# EAGLE board PCB_v8 (EAGLE 9.7.0)
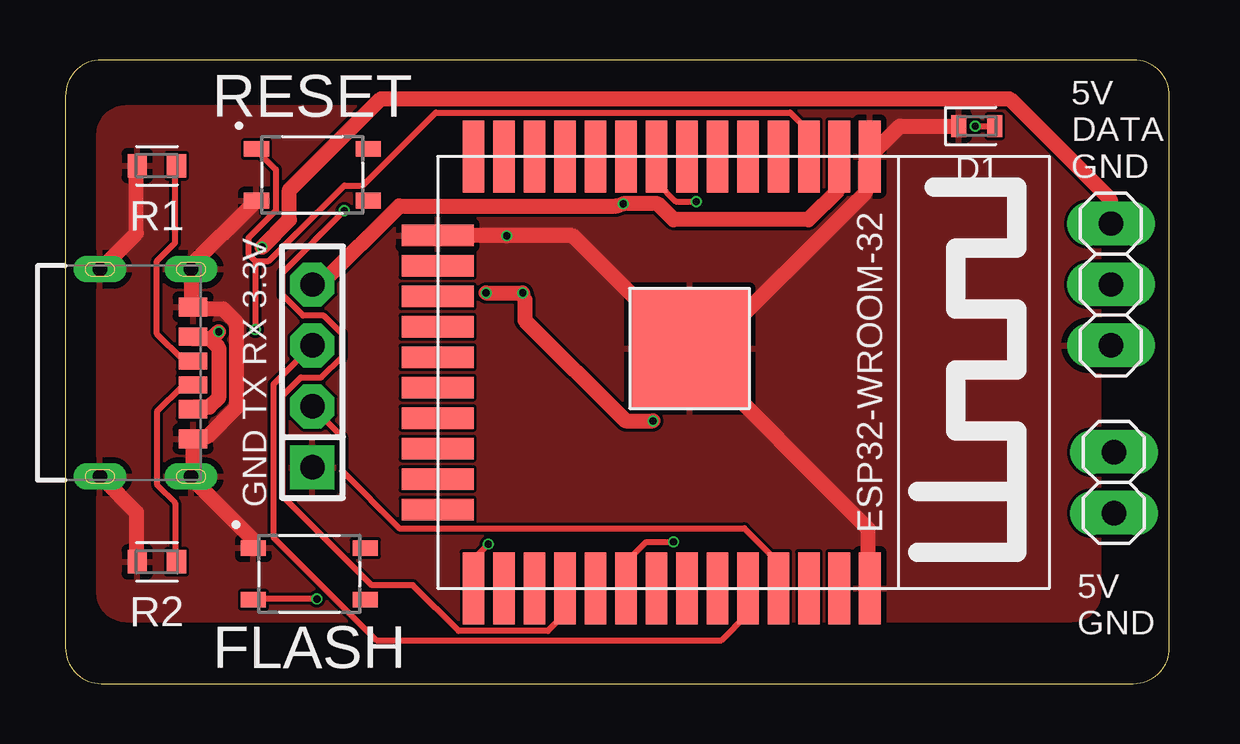
[diagram p0: board, top side]
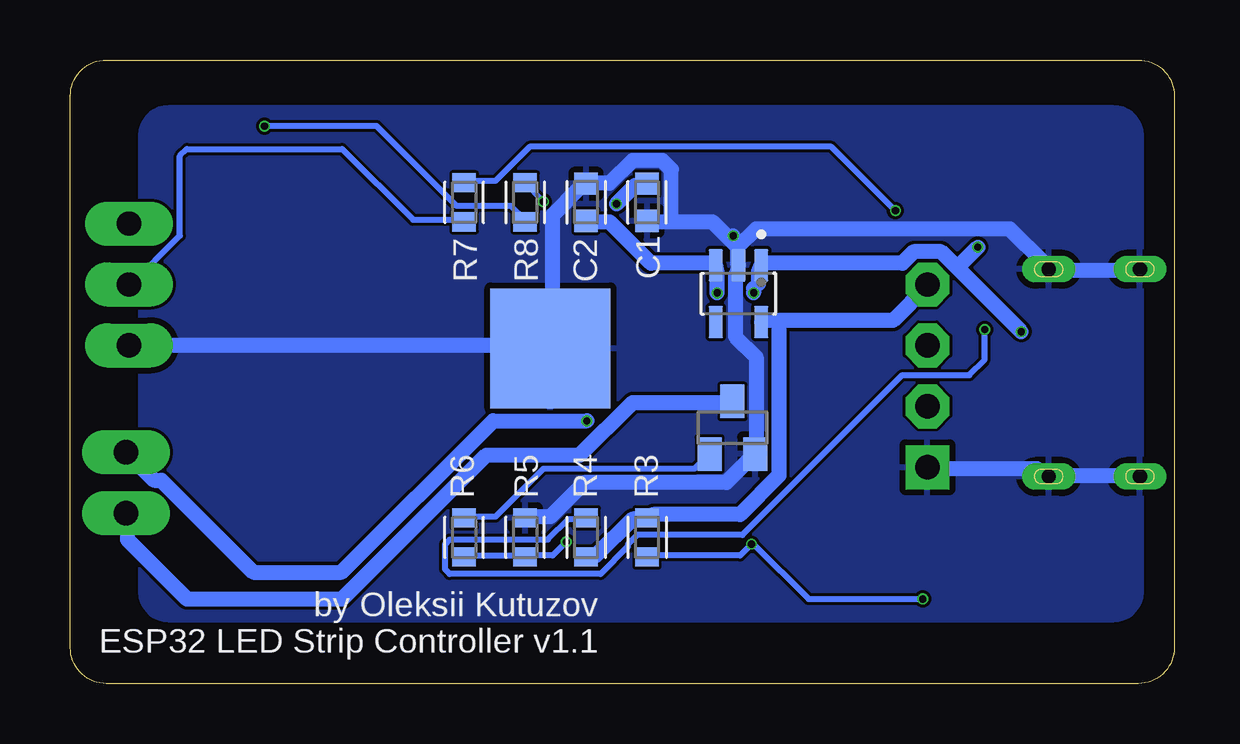
[diagram p1: board, bottom side, seen from below]

Size 46 x 26 mm. Coordinates in mm from the lower left corner, seen from the top.
Outline: 0,24.5 0,1.5 arc90 1.5,0 44.5,0 arc90 46,1.5 46,24.5 arc90 44.5,26 1.5,26 arc90 0,24.5
Copper layers (1*16): Top 0.035mm / dielectric 1.6mm / Bottom 0.035mm
Design rules "jlcpcb-2layers": minimum track width 5mil, minimum drill 0.3mm, track to track 5mil, track to pad 5mil, pad to pad 5mil, via to via 5mil, smd to smd 5mil, copper to edge 0.2mm, drill to drill 6mil, minimum pad ring 10mil, minimum via ring 3mil, stop-mask expansion 4mil, vias tented up to drill 0mil, thermal gap 10mil
Net classes: 0 default: width 0.254 mm; 1 5V: width 0.635 mm; 2 GND: width 0.635 mm

## Footprints (pad centres in the part's own frame; a part is rotated, then mirrored left to right if it is on the bottom)
CAPC1608X85 = smd 0.921 x 0.97: 1 -0.775,0; 2 0.775,0
LEDC1608X80N_FLAT-R = smd 0.612 x 0.912: A 0.75,0; C -0.75,0
GCT_USB4125-GF-A_REVA = smd 0.7 x 1.2: A5 -0.5,0.08; B5 0.5,0.08 | smd 0.76 x 1.2: A9 1.52,0.08; B9 -1.52,0.08 | smd 0.8 x 1.2: A12 2.75,0.08; B12 -2.75,0.08 | drill 0.6 pad 1.1 long: S1 -4.32,0; S2 4.32,0; S3 -4.32,-3.8; S4 4.32,-3.8
SIP-100-04-40 = drill 1.016 pad 1.778 square: 1 -3.81,0 | drill 1.016 pad 1.778 octagon: 2 -1.27,0; 3 1.27,0; 4 3.81,0
1X02 = drill 1.016 long: 1 -1.27,0; 2 1.27,0
1X03 = drill 1.016 long: 1 -2.54,0; 2 0,0; 3 2.54,0
SOT23 = smd 1 x 1.4: 1 -0.95,-1.1; 2 0.95,-1.1; 3 0,1.1
RESC1608X60 = smd 0.799 x 0.974: 1 -0.815,0; 2 0.815,0
SW_SKRPACE010 = smd 1.05 x 0.65: 1 -2.329,1.075; 2 2.329,1.075; 3 -2.329,-1.075; 4 2.329,-1.075
SOT95P285X140-5N = smd 1.35 x 0.6: 1 -1.185,0.95; 2 -1.185,0; 3 -1.185,-0.95; 4 1.185,-0.95; 5 1.185,0.95
ESP32-WROOM = smd 3 x 0.9: 3V3 0,16.74; EN 0,15.47; GND1 0,18.01; GND3 18,18.01; IO0 18,1.5; IO4 18,2.77; IO5 18,6.58; IO12 0,1.5; IO14 0,2.77; IO16 18,4.04; IO17 18,5.31; IO18 18,7.85; IO19 18,9.12; IO21 18,11.66; IO22 18,15.47; IO23 18,16.74; IO25 0,6.58; IO26 0,5.31; IO27 0,4.04; IO32 0,9.12; IO33 0,7.85; IO34 0,11.66; IO35 0,10.39; NC 18,10.39; RX 18,12.93; SENSOR_VN 0,12.93; SENSOR_VP 0,14.2; TX 18,14.2 | smd 0.9 x 3: CLK 9.635,0; CMD 8.365,0; GND2 3.285,0; IO2 14.715,0; IO13 4.555,0; IO15 13.445,0; SD0 10.905,0; SD1 12.175,0; SD2 5.825,0; SD3 7.095,0 | smd 5 x 5: GND4 8,10.5 | smd 5 x 5 bottom: GND5 8,10.5

## Placement (x,y rotation side)
C1  10uF  [CAPC1608X85]  21.97,20.07 270 bottom
C2  10uF  [CAPC1608X85]  24.51,20.07 90 bottom
D1  LED  [LEDC1608X80N_FLAT-R]  37.97,23.24 0 top
J1  USB4125-GF-A_REVA  [GCT_USB4125-GF-A_REVA]  5.24,12.95 270 top
J2  F-1X04-SIP-100-40  [SIP-100-04-40]  10.29,12.83 90 top
J3  PINHD-1X2  [1X02]  43.69,8.38 90 top
LED1  PINHD-1X3  [1X03]  43.56,16.64 90 top
Q1  NMOSFET  [SOT23]  18.41,10.67 0 bottom
R1  5.1k  [RESC1608X60]  3.81,21.59 180 top
R2  5.1k  [RESC1608X60]  3.81,5.08 180 top
R3  4.7K  [RESC1608X60]  21.97,6.1 90 bottom
R4  4.7K  [RESC1608X60]  24.51,6.1 90 bottom
R5  10k  [RESC1608X60]  27.05,6.1 270 bottom
R6  1k  [RESC1608X60]  29.59,6.1 270 bottom
R7  300-500 ohm  [RESC1608X60]  29.59,20.07 270 bottom
R8  430  [RESC1608X60]  27.05,20.07 90 bottom
S1  SKRPACE010  [SW_SKRPACE010]  10.16,4.57 0 top
S2  SKRPACE010  [SW_SKRPACE010]  10.29,21.21 0 top
U1  AP2112K-3.3TRG1  [SOT95P285X140-5N]  18.16,16.26 270 bottom
U2  ESP32-WROOM  [ESP32-WROOM]  15.5,21.97 270 top

## Library data of the parts
C1 C2 = Capacitor; CATEGORY: Capacitor
D1 = LED; CATEGORY: LED; COLOR: RED; DESCRIPTION: CHIP LED FLAT; SUB-CATEGORY: CHIP; TYPE: FLAT_TOP
J1 = USB4125-GF-A_REVA model; AVAILABILITY: Warning; DESCRIPTION: USB Charge Only Connector Type C Horizontal Receptacle, 3.16mm profile, 6 Pins, Surface mount, Top mount, low cost; MF: Global Connector Technology; MP: USB4125-GF-A; PACKAGE: None; PRICE: None; PURCHASE-URL: https://pricing.snapeda.com/search/part/USB4125-GF-A/?ref=eda
J2 = con-headers-jp
J3 LED1 = Connector; CATEGORY: CONNECTOR; SUB-CATEGORY: PIN-HEADER
Q1 = Transistor; CATEGORY: Transistor; SUB-CATEGORY: MOSFET; TYPE: N-Channel
R1-R8 = Resistor; CATEGORY: Resistor; SUB-CATEGORY: Fixed
S1 S2 = SKRPACE010; MANUFACTURER: ALPS; STANDARD: Maniufacturer Recommendations
U1 = AP2112K-3.3TRG1; MANUFACTURER: Diodes Inc.; PARTREV: 2-2
U2 = ESP32

## Nets
+3.3V [5V]: C1.1 J2.4 R3.2 R4.1 U1.5 U2.3V3
+5V [5V]: C2.1 J1.A9 J1.B9 J3.2 LED1.3 U1.1 U1.3
CC: J1.A5 R1.1
D [GND]: J3.1 Q1.3
DATA: LED1.2 R7.2
EN: R4.2 S2.1 U2.EN
ESP_RX: J2.3 U2.RX
ESP_TX: J2.2 U2.TX
G: Q1.1 R6.1
GND [GND]: C1.2 C2.2 D1.C J1.A12 J1.B12 J1.S1 J1.S2 J1.S3 J1.S4 J2.1 LED1.1 Q1.2 R1.2 R2.2 R5.1 S1.1 S2.3 U1.2 U2.GND1 U2.GND2 U2.GND3 U2.GND4 U2.GND5
GPIO0: R3.1 S1.3 U2.IO0
GPIO17: R7.1 U2.IO17
GPIO18: R5.2 R6.2 U2.IO18
GPIO32: R8.2 U2.IO32
LED: D1.A R8.1
N$1: J1.B5 R2.1

## Tracks (layer width: path | path; a pad name or v marks a point on that pad's centre or on a via)
+3.3V  (via drill 0.3)
  Top 0.635: U2.3V3 32.19,21.91 32.19,20.57 30.96,19.34 25.34,19.34 24.67,20 v23.24,20 22.95,19.91 13.91,19.91 10.67,16.67 10.29,16.67 J2.4
  Bottom 0.635: v23.24,20 22.48,20.77 22,20.77 C1.1 | R4.1 24.48,5.33 24.1,5.33 22.57,6.86 22,6.86 R3.2 21.72,7.05 18.1,7.05 16.48,8.67 16.48,15.14 | 16.48,15.14 11.72,15.14 10.29,16.57 J2.4 | 16.48,15.14 17.14,15.14 U1.5
+5V  (via drill 0.3)
  Top 0.635: 6.05,14.34 6,14.38 5.33,14.38 J1.B9 | 6.05,14.34 6.38,14 6.38,11.91 6,11.53 5.33,11.53 J1.A9 | 6.05,14.34 v6.38,14.67 | v17.53,16.29 v19.05,16.29 19.14,16 19.14,15.14 23.34,10.95 v24.48,10.95 | v8.19,18.19 9.34,19.34 9.34,20.57 13.14,24.38 39.34,24.38 43.53,20.19 43.53,19.24 LED1.3
  Bottom 0.635: C2.1 24.48,19.24 23.53,19.24 21.81,17.53 19.14,17.53 U1.3 19.05,17.14 v19.05,16.29 | v6.38,14.67 9.05,17.34 | 9.05,17.34 9.72,18 10.86,18 11.34,17.53 17.14,17.53 U1.1 17.34,17.14 17.34,16.67 17.53,16.48 v17.53,16.29 | 9.05,17.34 v8.19,18.19 | v24.48,10.95 28.38,10.95 34.7,4.64 38.38,4.64 42.21,8.47 42.51,8.47 J3.2
CC
  Top 0.254: R1.1 4.57,21.53 4.57,18.38 3.81,17.62 3.81,14.57 4.86,13.53 5.24,13.53 J1.A5
D
  Bottom 0.635: Q1.3 18.48,11.72 22.57,11.72 24.77,9.53 28.67,9.53 34.67,3.52 41.15,3.52 43.62,6 43.62,7.05 J3.1
DATA
  Bottom 0.254: R7.2 29.62,19.34 31.72,19.34 34.67,22.29 41.15,22.29 41.43,22 41.43,18.67 43.53,16.57 LED1.2
EN  (via drill 0.3)
  Top 0.254: 7.91,17.62 v7.91,14.76 | 7.91,17.62 7.62,17.91 7.62,18.57 8.76,19.72 8.76,21.43 8,22.19 S2.1 | 7.91,17.62 8.48,17.62 11.62,20.77 12.38,20.77 15.43,23.81 30.19,23.81 30.96,23.05 30.96,22 U2.EN
  Bottom 0.254: v7.91,14.76 7.91,13.49 8.54,12.86 11.34,12.86 18,6.19 22.38,6.19 22.77,5.81 22.77,5.71 23.91,4.57 30.19,4.57 30.39,4.76 30.39,5.81 30.19,6 26.1,6 25.24,6.86 24.57,6.86 R4.2
ESP_RX
  Top 0.254: J2.3 8.67,12.48 8.67,6.1 12.95,1.81 27.34,1.81 28.38,2.86 28.38,3.9 U2.RX
ESP_TX
  Top 0.254: U2.TX 29.62,4 29.62,5.14 28.29,6.48 13.91,6.48 11.53,8.86 11.53,10.29 10.29,11.53 J2.2
G
  Bottom 0.254: R6.1 29.53,6.95 28.29,6.95 26.29,8.95 20,8.95 19.43,9.53 Q1.1
GND  (via drill 0.3)
  Top 0.635: D1.C 34.77,23.24 33.53,22 U2.GND1 33.34,21.72 33.34,20.48 26.57,13.72 U2.GND5 | U2.GND3 33.43,4 33.43,6.48 26,13.91 U2.GND5 | U2.GND2 15.53,18.67 v18.38,18.67 21.14,18.67 25.72,14.1 U2.GND5 | R1.2 2.95,21.53 2.95,18.76 1.52,17.34 J1.S3 | S2.3 7.91,20.1 5.14,17.34 J1.S1 5.24,16.95 5.24,15.72 J1.B12 5.62,15.62 6.57,15.62 7.14,15.05 7.14,11.53 5.91,10.29 5.62,10.29 J1.A12 5.33,10.19 5.33,8.95 J1.S2 5.24,8.57 7.81,6 7.81,5.71 S1.1 | R2.2 2.95,5.14 2.95,7.14 1.52,8.57 J1.S4
  Bottom 0.635: R5.1 27.05,6.95 26,6.95 24.57,8.38 18.67,8.38 17.53,9.53 Q1.2 17.43,9.81 17.43,13.62 18.29,14.48 18.29,17.05 18.19,17.14 U1.2 18.19,17.53 18.19,18.19 | 20.95,19.24 19.24,19.24 18.53,18.53 | 20.95,19.24 21.91,19.24 C1.2 | 18.19,18.19 18.53,18.53 | 20.95,19.24 20.95,21.43 21.34,21.81 22.57,21.81 23.53,20.86 24.48,20.86 C2.2 24.77,20.67 25.91,19.53 25.91,14 U2.GND5 26.29,14.1 LED1.1 | J1.S3 1.52,17.24 5.14,17.24 J1.S1 5.43,17.53 6.86,18.95 17.43,18.95 18.19,18.19 | J1.S4 1.52,8.67 5.14,8.67 J1.S2 5.52,8.76 5.71,8.95 10.29,8.95 J2.1 | v18.38,18.67 18.53,18.53
  pour Bottom: 2.54,2.62 41.91,2.62 42.12,2.63 42.32,2.69 42.51,2.78 42.68,2.9 42.82,3.04 42.94,3.21 43.03,3.4 43.09,3.6 43.1,3.81 43.1,22.86 43.09,23.07 43.03,23.27 42.94,23.46 42.82,23.63 42.68,23.77 42.51,23.89 42.32,23.98 42.12,24.04 41.91,24.05 2.54,24.05 2.33,24.04 2.13,23.98 1.94,23.89 1.77,23.77 1.63,23.63 1.51,23.46 1.42,23.27 1.36,23.07 1.35,22.86 1.35,3.81 1.36,3.6 1.42,3.4 1.51,3.21 1.63,3.04 1.77,2.9 1.94,2.78 2.13,2.69 2.33,2.63
  pour Top: 2.54,2.62 41.91,2.62 42.12,2.63 42.32,2.69 42.51,2.78 42.68,2.9 42.82,3.04 42.94,3.21 43.03,3.4 43.09,3.6 43.1,3.81 43.1,22.86 43.09,23.07 43.03,23.27 42.94,23.46 42.82,23.63 42.68,23.77 42.51,23.89 42.32,23.98 42.12,24.04 41.91,24.05 2.54,24.05 2.33,24.04 2.13,23.98 1.94,23.89 1.77,23.77 1.63,23.63 1.51,23.46 1.42,23.27 1.36,23.07 1.35,22.86 1.35,3.81 1.36,3.6 1.42,3.4 1.51,3.21 1.63,3.04 1.77,2.9 1.94,2.78 2.13,2.69 2.33,2.63
GPIO0  (via drill 0.3)
  Top 0.254: v17.62,5.81 17.05,5.24 17.05,4 U2.IO0 | v10.48,3.52 7.91,3.52 S1.3
  Bottom 0.254: R3.1 21.91,5.33 18.1,5.33 v17.62,5.81 17.53,5.81 15.24,3.52 v10.48,3.52
GPIO17  (via drill 0.3)
  Top 0.254: v11.62,19.72 9.05,17.14 9.05,16.19 9.91,15.34 10.76,15.34 11.53,14.57 11.53,13.62 10.67,12.76 9.81,12.76 9.05,12 9.05,7.81 12.76,4.1 14.48,4.1 16.38,2.19 20.1,2.19 20.77,2.86 20.77,3.9 U2.IO17
  Bottom 0.254: v11.62,19.72 14.29,22.38 26.86,22.38 28.29,20.95 29.53,20.95 R7.1
GPIO18  (via drill 0.3)
  Top 0.254: v25.34,5.91 24.19,5.91 23.43,5.14 23.43,4 U2.IO18
  Bottom 0.254: R6.2 29.53,5.33 27.05,5.33 R5.2 26.96,5.33 25.91,5.33 v25.34,5.91
GPIO32  (via drill 0.3)
  Top 0.254: v26.29,20.1 25.43,20.1 24.67,20.86 24.67,21.91 U2.IO32
  Bottom 0.254: v26.29,20.1 27.05,20.86 R8.2
LED  (via drill 0.3)
  Top 0.254: v37.91,23.24 D1.A
  Bottom 0.254: v37.91,23.24 33.24,23.24 29.91,19.91 27.62,19.91 27.05,19.34 R8.1
N$1
  Top 0.254: R2.1 4.57,5.14 4.57,7.53 3.81,8.29 3.81,11.34 4.86,12.38 5.24,12.38 J1.B5
(copper drawn outside any net)
  shapes: Top area x1

## Text on the board
tNames: RESET | 5V / DATA / GND | GND TX RX 3.3V | 5V / GND | FLASH
bNames: by Oleksii Kutuzov / ESP32 LED Strip Controller v1.1